# Altium PCB AT_START_F425_V1.0.pcbdoc (part 2 of 2)
Units mil, origin at the board's own origin, x right, y up, seen from the top; angles counter-clockwise.
Board outline 5780.4 x 4040.43 mil, 2 copper layers (Top Layer, Bottom Layer); 128 components, 128 nets, 477 pads, 724 vias.
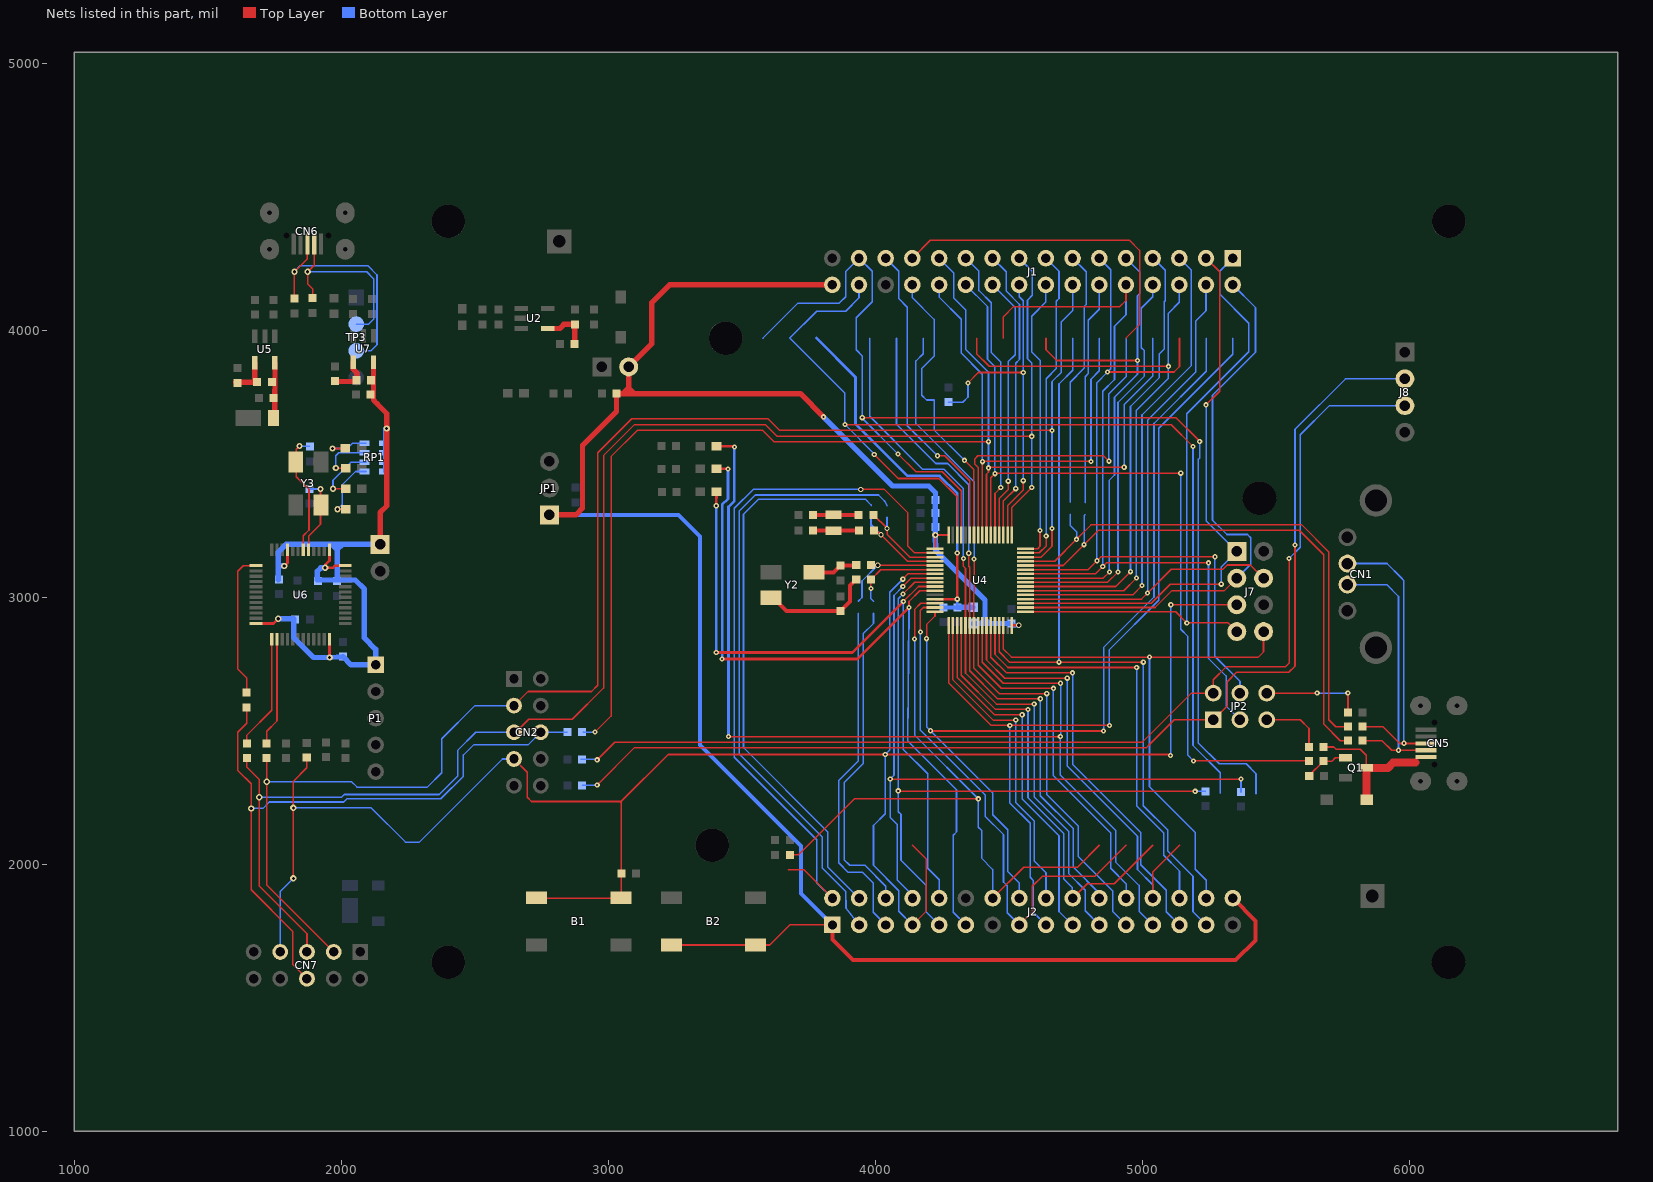
[diagram p2: the nets of this part, all layers, seen from the top]

## Via types
v1: diameter 19.69, hole 7.87, Top Layer to Bottom Layer, tented both sides, 682 vias
v2: diameter 23.62, hole 11.81, Top Layer to Bottom Layer, tented both sides, 33 vias
v3: diameter 19.69, hole 12, Top Layer to Bottom Layer, tented both sides, 5 vias
v4: diameter 27.56, hole 15.75, Top Layer to Bottom Layer, tented both sides, 3 vias
v5: diameter 24, hole 12, Top Layer to Bottom Layer, tented both sides, 1 vias

## Nets (pads, with @x,y where several pads share a name; then routed paths per layer and width w, separated by ;. In a path a pad name is that pad's centre, name@x,y a point inside that pad or via, vN(x,y) a via of type N, cw(c..) or ccw(c..) an arc to the next point about the centre after c; other vN are vias at no path point) (continued)
M_ATLK_SWCLK: R41.2 U6.25 | length 427
  Top Layer w6: R41.2@1645.86,2454.01 1645.86,2483.43 1739.07,2576.64 U6.25@1739.07,2842.36
M_ATLK_SWDIO: R44.2 U6.26 | length 404.5
  Top Layer w6: R44.2@1719.86,2454.01 1719.86,2497.43 1758.75,2536.32 U6.26@1758.75,2842.36
M_ATLK_SWO: R52.2 U6.13 | length 541.5
  Top Layer w6: R52.2@1645.66,2646.97 1645.66,2696.8 1611.44,2731.01 1611.44,3097.01 1632.39,3117.97 U6.13@1680.01,3117.97
NRST: B1.1 B1.2 C13.2 CN2.7 CN7.7 J2.7 J7.5 R46.1 U4.7 | length 7810.6
  Top Layer w6: v2(1820.09,1946.57) 1820.09,2310.57 1870.09,2360.57 1870.09,2393.24 R46.1@1867.86,2391.01 ; CN2.7@2646.44,2393.84 2696.09,2344.2 2696.09,2250.57 2712.09,2234.57 3043.59,2234.57 ; B1.1@2730.09,1872.57 3053.05,1872.57 B1.2@3055.05,1870.57 ; B1.2@3045.09,1872.57 3048.59,1876.07 C13.2@3048.59,1964.57 3048.59,2235.07 ; 3048.59,2228.51 3048.59,2229.57 3043.59,2234.57 ; v1(4103.09,3067.57) 4122.71,3087.19 U4.7@4223.8,3087.18 ; J2.7@4139.38,1772.14 4190.09,1822.84 4190.09,2019.87 4139.39,2070.57 ; v1(5106.09,2407.05) 5102.58,2410.57 v1(4037.09,2410.57) 3224.09,2410.57 3048.59,2235.07 ; v1(5107.09,2971.57) 5353.99,2971.57 J7.5@5354.39,2971.16 ; 3043.59,2234.57 3048.59,2235.07
  Bottom Layer w6: CN7.7@1770.89,1670.96 1770.86,1897.34 v2(1820.09,1946.57) ; v2(1820.09,2210.57) 2112.09,2210.57 2240.09,2082.57 2292.09,2082.57 2603.37,2393.84 CN2.7@2646.44,2393.84 ; v1(4103.09,3067.57) 4054.09,3018.57 4054.09,2427.57 v1(4037.09,2410.57) 4037.09,2188.57 3993.09,2144.57 3993.09,1995.57 4088.09,1900.57 4088.09,1823.43 J2.7@4139.38,1772.14 ; v1(5106.09,2407.05) 5106.09,2970.57 v1(5107.09,2971.57)
OTG_FS_D+: CN1.3 CN5.3 R19.2 | length 1110
  Top Layer w6: R19.2@5825.59,2514.57 5902.09,2514.57 5964.69,2451.97 CN5.3@6062.07,2451.97
  Bottom Layer w6: CN1.3@5768.74,3125.94 5916.72,3125.93 5968.09,3074.57 5980.09,3062.57 5980.09,2740.57 v1(5980.09,2452.57)
OTG_FS_D-: CN1.2 CN5.2 R20.1 | length 1037.3
  Top Layer w6: R20.1@5825.59,2462.57 5898.09,2462.57 5934.28,2426.38 CN5.2@6062.07,2426.38
  Bottom Layer w6: CN1.2@5768.74,3047.2 5915.46,3047.2 5960.09,3002.57 v1(5960.09,2426.57)
OTG_FS_ID: JP2.6 R18.2 | length 376.2
  Top Layer w6: JP2.6@5466.09,2640.57 v1(5655.09,2640.57) ; v1(5770.09,2640.57) 5770.59,2640.07 R18.2@5770.59,2568.57
  Bottom Layer w6: v1(5655.09,2640.57) v1(5770.09,2640.57)
OTG_FS_VBUS: JP2.5 R21.2 | length 241.5
  Top Layer w6: JP2.5@5466.09,2540.57 5592.09,2540.57 5624.59,2508.07 R21.2@5624.59,2438.57
PA0: J2.14 R5.1 U4.14 | length 2564.2
  Top Layer w6: R5.1@3679.59,2034.57 3712.09,2034.57 3922.09,2244.57 v1(4386.09,2244.57) ; v1(4147.09,2843.57) 4147.09,2953.57 4170.47,2976.95 U4.14@4223.8,2976.95 ; J2.14@4439.38,1872.14 4555.81,1988.57 4757.39,1988.57 4839.39,2070.57
  Bottom Layer w6: v1(4147.09,2843.57) 4147.09,2483.57 v1(4386.09,2244.57) 4386.09,2138.57 4398.09,2126.57 4398.09,2022.57 4439.39,1979.87 J2.14@4439.38,1872.14
PA1: J2.15 U4.15 | length 1970.6
  Top Layer w6: v1(4169.09,2869.57) 4169.09,2950.57 4179.73,2961.2 U4.15@4223.8,2961.2 ; J2.15@4539.38,1772.14 4588.09,1820.85 4588.09,1916.57 4626.09,1954.57 4823.39,1954.57 4939.39,2070.57
  Bottom Layer w6: v1(4169.09,2869.57) 4169.09,2501.57 4412.09,2258.57 4412.09,2178.57 4480.09,2110.57 4480.09,1932.57 4494.09,1918.57 4494.09,1817.43 J2.15@4539.38,1772.14
PA2: J2.16 U4.16 | length 3509.9
  Top Layer w6: v1(4192.09,2844.57) 4192.09,2897.57 4223.79,2929.27 U4.16@4223.8,2945.45 ; v1(4207.09,2499.57) 4208.09,2498.57 v1(4855.09,2498.57)
  Bottom Layer w6: v1(4192.09,2844.57) 4192.09,2514.57 v1(4207.09,2499.57) 4440.09,2266.57 4440.09,2184.57 4496.09,2128.57 4496.09,1972.57 4539.39,1929.27 J2.16@4539.38,1872.14 ; v1(4855.09,2498.57) 4855.09,2811.57 5044.09,3000.57 5044.09,3650.57 5239.39,3845.86 5239.39,3970.57
PA3: J2.17 U4.17 | length 3329.4
  Top Layer w6: U4.17@4274.98,2894.28 4274.98,2678.68 4434.09,2519.57 v1(4504.09,2519.57) v1(4877.09,2519.57)
  Bottom Layer w6: v1(4504.09,2519.57) 4504.09,2228.57 4580.09,2152.57 4580.09,1950.57 4592.09,1938.57 4592.09,1819.43 J2.17@4639.38,1772.14 ; v1(4877.09,2519.57) 4877.09,2803.57 5062.09,2988.57 5062.09,3632.57 5339.09,3909.57 5339.09,3970.57
PA4: J2.20 U4.20 | length 1648.6
  Top Layer w6: U4.20@4322.23,2894.28 4322.23,2707.43 4450.09,2579.57 v1(4572.09,2579.57) ; J2.20@4739.38,1872.14 4793.81,1926.57 4895.39,1926.57 5039.39,2070.57
  Bottom Layer w6: v1(4572.09,2579.57) 4572.09,2248.57 4706.09,2114.57 4706.09,1944.57 4738.09,1912.57 4738.09,1873.43 J2.20@4739.38,1872.14
PA5: J2.21 U4.21 | length 2684.1
  Top Layer w6: v1(4330.09,3144.57) 4330.09,3115.57 4337.96,3107.69 U4.21@4337.97,2894.28 4337.97,2715.68 4454.09,2599.57 v1(4595.09,2599.57)
  Bottom Layer w6: 3979.39,3970.57 3979.39,3677.26 4178.09,3478.57 4258.09,3478.57 4330.09,3406.57 v1(4330.09,3144.57) ; v1(4595.09,2599.57) 4595.09,2251.57 4724.09,2122.57 4724.09,1964.57 4786.09,1902.57 4786.09,1825.43 J2.21@4839.38,1772.14
PA6: J2.22 U4.22 | length 2533.3
  Top Layer w6: v1(4350.09,3164.57) 4350.09,3115.57 4353.71,3111.94 U4.22@4353.72,2894.28 4353.72,2723.93 4458.09,2619.57 v1(4618.09,2619.57)
  Bottom Layer w6: 4079.39,3970.57 4079.39,3647.26 4226.09,3500.57 4271.09,3500.57 4350.09,3421.57 v1(4350.09,3164.57) ; v1(4618.09,2619.57) 4618.09,2256.57 4742.09,2132.57 4742.09,1988.57 4839.39,1891.27 J2.22@4839.38,1872.14
PA7: J2.23 U4.23 | length 2639.8
  Top Layer w6: v1(4370.09,3142.57) U4.23@4369.47,2894.28 4369.47,2734.18 4465.09,2638.57 v1(4642.09,2638.57)
  Bottom Layer w6: 4179.39,3970.57 4179.39,3911.86 4152.09,3884.57 4152.09,3650.57 4370.09,3432.57 v1(4370.09,3142.57) ; v1(4642.09,2638.57) 4642.09,2260.57 4760.09,2142.57 4760.09,2028.71 4890.09,1898.71 4890.09,1821.43 J2.23@4939.38,1772.14
PA8: J1.9 U4.41 | length 1970.4
  Top Layer w6: U4.41@4562.38,3071.43 4853.96,3071.44 v1(4877.09,3094.57) ; 4639.39,3970.57 4639.39,3927.26 4680.09,3886.57 v1(4982.09,3886.57)
  Bottom Layer w6: v1(4877.09,3094.57) 4877.09,3438.57 4896.09,3457.57 4896.09,3748.57 4982.09,3834.57 4982.09,4129.53 4990.09,4137.53 4990.09,4218.73 J1.9@4938.96,4269.86
PA9: J1.10 JP2.3 U4.42 | length 3053.8
  Top Layer w6: 4479.39,3970.57 4479.39,4049.86 4518.09,4088.57 4916.09,4088.57 4938.96,4111.44 J1.10@4938.96,4169.86 ; U4.42@4562.38,3087.18 4824.71,3087.19 v1(4852.09,3114.57) 4866.09,3128.57 v1(5248.09,3128.57)
  Bottom Layer w6: v1(4852.09,3114.57) 4852.09,3771.57 4896.09,3815.57 4896.09,4014.57 4938.96,4057.43 J1.10@4938.96,4169.86 ; v1(5248.09,3128.57) 5248.09,2770.57 5314.09,2704.57 5314.09,2592.57 JP2.3@5366.09,2540.57
PA10: J1.11 JP2.4 U4.43 | length 2836.9
  Top Layer w6: U4.43@4562.38,3102.93 4796.46,3102.94 v1(4830.09,3136.57) 4845.09,3151.57 v1(5272.09,3151.57) ; v1(4870.09,3843.57) 5119.09,3843.57 5139.39,3863.86 5139.39,3970.57
  Bottom Layer w6: v1(4830.09,3136.57) 4830.09,3803.57 v1(4870.09,3843.57) 4882.09,3855.57 4882.09,4226.73 J1.11@4838.96,4269.86 ; v1(5272.09,3151.57) 5272.09,2778.57 5366.09,2684.57 JP2.4@5366.09,2640.57
PA11: R20.2 U4.44 | length 2075.2
  Top Layer w6: U4.44@4562.38,3118.68 4704.21,3118.69 v1(4782.09,3196.57) 4836.09,3250.57 5588.09,3250.57 5680.09,3158.57 5680.09,2524.57 5742.09,2462.57 R20.2@5770.59,2462.57
  Bottom Layer w6: v1(4782.09,3196.57) 4782.09,3305.45 4786.09,3309.45
PA11_E: J1.12 | length 837.9
  Bottom Layer w6: 4786.09,3353.84 4786.09,3825.57 4798.09,3837.57 4798.09,4037.57 4838.96,4078.43 J1.12@4838.96,4169.86
PA12: R19.1 U4.45 | length 2050.9
  Top Layer w6: U4.45@4562.38,3134.43 4671.95,3134.43 v1(4754.09,3216.57) 4808.09,3270.57 5598.09,3270.57 5699.09,3169.57 5699.09,2540.57 5725.09,2514.57 R19.1@5770.59,2514.57
  Bottom Layer w6: 4730.09,3311.28 4730.09,3268.57 4754.09,3244.57 v1(4754.09,3216.57)
PA12_E: J1.13 | length 960.2
  Bottom Layer w6: 4730.09,3355.68 4730.09,3805.57 4782.09,3857.57 4782.09,4088.57 4790.09,4096.56 4790.09,4218.73 J1.13@4738.96,4269.86
PA13/SWDIO: CN2.3 CN7.3 J1.14 R44.1 U4.46 | length 6078.3
  Top Layer w6: R44.1@1719.86,2393.01 1719.86,2308.8 v2(1720.09,2308.57) 1720.09,1921.79 CN7.3@1970.89,1670.96 ; CN2.3@2646.44,2593.84 2699.16,2646.57 2937.09,2646.57 2960.09,2669.57 2960.09,3540.57 3088.09,3668.57 3598.09,3668.57 3642.09,3624.57 v1(4662.09,3624.57) ; U4.46@4562.38,3150.18 4621.7,3150.18 4662.09,3190.57 v1(4662.09,3257.57)
  Bottom Layer w6: v2(1720.09,2308.57) 2038.09,2308.57 2058.09,2288.57 2322.09,2288.57 2376.09,2342.57 2376.09,2469.57 2500.37,2593.84 CN2.3@2646.44,2593.84 ; v1(4662.09,3257.57) v1(4662.09,3624.57) 4662.09,3807.57 4696.09,3841.57 4696.09,4030.57 4738.96,4073.43 J1.14@4738.96,4169.86
PA14/SWCLK: CN2.5 CN7.5 J1.17 R41.1 U4.49 | length 5974.6
  Top Layer w6: R41.1@1645.86,2393.01 1645.86,2362.8 1692.09,2316.57 1692.09,1917.57 1870.86,1738.8 CN7.5@1870.89,1670.96 ; CN2.5@2646.44,2493.84 2653.37,2493.84 2702.09,2542.57 2865.09,2542.57 2982.09,2659.57 2982.09,3530.57 3098.09,3646.57 3588.09,3646.57 3632.09,3602.57 v1(4586.09,3602.57) ; U4.49@4511.2,3232.86 4511.19,3335.67 v1(4586.09,3410.57)
  Bottom Layer w6: v2(1692.09,2250.57) 2000.09,2250.57 2010.09,2260.57 2366.09,2260.57 2435.09,2329.57 2435.09,2425.57 2503.37,2493.84 CN2.5@2646.44,2493.84 ; J1.17@4538.96,4269.86 4588.09,4220.73 4588.09,4130.56 4570.09,4112.56 4570.09,3893.26 4586.09,3877.26 v1(4586.09,3602.57) v1(4586.09,3410.57)
PA15: J1.18 R39.2 U4.50 | length 1324.6
  Top Layer w6: v1(4347.09,3802.57) 4386.09,3841.57 v1(4554.09,3841.57) ; U4.50@4495.45,3232.86 4495.44,3342.92 4554.09,3401.57 v1(4554.09,3436.57)
  Bottom Layer w6: R39.2@4274.09,3730.43 4327.95,3730.43 4347.09,3749.57 v1(4347.09,3802.57) ; J1.18@4538.96,4169.86 4538.96,4125.69 4554.09,4110.56 v1(4554.09,3841.57) v1(4554.09,3436.57)
PB0: J2.26 U4.26 | length 1657
  Top Layer w6: U4.26@4416.71,2894.28 4416.71,2764.95 4485.09,2696.57 v1(4719.09,2696.57) ; J2.26@5039.38,1872.14 5039.39,1970.56 5139.39,2070.57
  Bottom Layer w6: v1(4719.09,2696.57) 4719.09,2367.57 4982.09,2104.57 4982.09,1979.57 5039.39,1922.27 J2.26@5039.38,1872.14
PB1: J2.27 U4.27 | length 1560.2
  Top Layer w6: U4.27@4432.46,2894.28 4432.46,2775.2 4491.09,2716.57 v1(4739.09,2716.57)
  Bottom Layer w6: v1(4739.09,2716.57) 4739.09,2373.57 4994.09,2118.57 4994.09,1997.57 5090.09,1901.57 5090.09,1821.43 J2.27@5139.38,1772.14
PB2: J2.28 U4.28 | length 1590.8
  Top Layer w6: U4.28@4448.21,2894.28 4448.21,2785.45 4497.09,2736.57 v1(4979.09,2736.57)
  Bottom Layer w6: v1(4979.09,2736.57) 4979.09,2482.09 4980.09,2481.09 4980.09,2216.57 5080.09,2116.57 5080.09,2033.14 5139.38,1973.86 J2.28@5139.38,1872.14
PB3: J1.23 R8.1 U4.55 | length 4727.7
  Top Layer w6: v1(2950.09,2494.57) 3010.09,2554.57 3010.09,3526.57 3108.09,3624.57 3578.09,3624.57 3620.09,3582.57 v1(4424.09,3582.57) ; U4.55@4416.71,3232.86 4416.71,3461.18 4424.09,3468.57 v1(4424.09,3484.57) 4426.09,3486.57 v1(4932.09,3486.57)
  Bottom Layer w6: R8.1@2905.24,2494.74 v1(2950.09,2494.57) ; J1.23@4238.96,4269.86 4294.09,4214.73 4294.09,4120.56 4338.09,4076.57 4338.09,3928.57 4424.09,3842.57 v1(4424.09,3582.57) v1(4424.09,3484.57) ; v1(4932.09,3486.57) 4932.09,3721.57 5039.39,3828.86 5039.39,3970.57
PB4: J1.24 U4.56 | length 1886.6
  Top Layer w6: U4.56@4400.97,3232.86 4400.96,3507.44 v1(4401.09,3507.57) 4402.09,3508.57 v1(4808.09,3508.57)
  Bottom Layer w6: J1.24@4238.96,4169.86 4238.96,4124.69 4322.09,4041.57 4322.09,3914.57 4401.09,3835.57 v1(4401.09,3507.57) ; v1(4808.09,3508.57) 4808.09,3816.57 4839.39,3847.86 4839.39,3970.57
PB5: J1.25 U4.57 | length 2536.7
  Top Layer w6: J1.25@4138.96,4269.86 4205.66,4336.56 4952.09,4336.56 4990.09,4298.56 4990.09,4021.26 4939.39,3970.57 ; U4.57@4385.22,3232.86 4385.22,3485.43 4373.09,3497.57 4373.09,3518.57 4384.09,3529.57 4855.09,3529.57 v1(4875.09,3509.57)
  Bottom Layer w6: v1(4875.09,3509.57) 4875.09,3761.57 4939.39,3825.86 4939.39,3970.57
PB6: J1.26 U4.58 | length 1087
  Top Layer w6: v1(4334.09,3512.57) 4369.46,3477.19 U4.58@4369.47,3232.86
  Bottom Layer w6: J1.26@4138.96,4169.86 4138.96,4121.69 4220.09,4040.57 4220.09,3902.57 4174.09,3856.57 4174.09,3756.57 4192.17,3738.64 4220.09,3738.64 4220.09,3626.57 v1(4334.09,3512.57)
PB7: J1.27 U4.59 | length 1183.2
  Top Layer w6: v1(4233.09,3529.57) 4260.09,3529.57 4353.71,3435.94 U4.59@4353.72,3232.86
  Bottom Layer w6: J1.27@4038.96,4269.86 4088.09,4220.73 4088.09,4118.56 4120.09,4086.57 4120.09,3642.57 v1(4233.09,3529.57)
PB8: J1.29 U4.61 | length 4613.6
  Top Layer w6: v1(3951.09,3672.57) 5126.09,3672.57 v1(5215.09,3583.57) ; v1(4085.09,3536.57) 4152.09,3469.57 4251.09,3469.57 4322.23,3398.43 U4.61@4322.23,3232.86
  Bottom Layer w6: 3579.39,3970.57 3710.39,4101.56 3865.09,4101.56 3889.09,4125.56 3889.09,4219.99 J1.29@3938.96,4269.86 3988.09,4220.73 3988.09,4106.56 3928.09,4046.57 3928.09,3926.57 3951.09,3903.57 v1(3951.09,3672.57) 3951.09,3670.57 v1(4085.09,3536.57) ; v1(5215.09,3583.57) 5215.09,3521.57 5210.09,3516.51 5210.09,2453.57 5288.09,2375.57 5389.09,2375.57 5426.09,2338.57 5426.09,2263.84
PB9: J1.30 U4.62 | length 4136.2
  Top Layer w6: v1(3886.09,3646.57) 3938.44,3646.57 3938.09,3646.57 5109.09,3645.57 v1(5190.09,3564.57) ; v1(3996.09,3534.57) 4086.09,3444.57 4238.09,3444.57 4306.48,3376.18 U4.62@4306.48,3232.86
  Bottom Layer w6: J1.30@3938.96,4169.86 3938.96,4121.44 3889.09,4071.57 3780.39,4071.57 3679.39,3970.57 3886.09,3763.86 v1(3886.09,3646.57) 3996.09,3536.57 v1(3996.09,3534.57) ; v1(5190.09,3564.57) 5190.09,2444.57 5292.09,2342.57 5292.09,2265.84
PB10: J2.29 U4.29 | length 2972
  Top Layer w6: U4.29@4463.96,2894.28 4463.96,2795.7 4503.09,2756.57 v1(4688.09,2756.57) v1(5004.09,2756.57)
  Bottom Layer w6: v1(4688.09,2756.57) 4688.09,3798.57 4739.39,3849.86 4739.39,3970.57 ; v1(5004.09,2756.57) 5004.09,2218.57 5096.09,2126.57 5096.09,2048.57 5190.09,1954.57 5190.09,1821.43 J2.29@5239.38,1772.14
PB11: J2.30 J7.8 U4.30 | length 2151.2
  Top Layer w6: U4.30@4479.71,2894.28 4479.71,2805.95 4510.09,2775.57 v1(5027.09,2775.57) 5435.09,2775.57 5454.39,2794.86 J7.8@5454.39,2871.16
  Bottom Layer w6: v1(5027.09,2775.57) 5027.09,2289.57 5198.09,2118.57 5198.09,1980.57 5239.38,1939.28 J2.30@5239.38,1872.14
PB12: J1.1 J7.7 U4.33 | length 2350.6
  Top Layer w6: U4.33@4562.38,2945.45 5125.2,2945.46 v1(5167.09,2903.57) 5321.99,2903.57 J7.7@5354.39,2871.16
  Bottom Layer w6: v1(5167.09,2903.57) 5167.09,3687.57 5399.09,3919.57 5399.09,4026.59 5290.09,4135.59 5290.09,4220.99 J1.1@5338.96,4269.86
PB13: J1.2 J7.3 U4.34 | length 2164
  Top Layer w6: U4.34@4562.38,2961.2 5047.73,2961.2 5111.09,3024.57 5307.79,3024.57 J7.3@5354.39,3071.16
  Bottom Layer w6: J1.2@5338.96,4169.86 5424.09,4084.74 5424.09,3917.57 5263.09,3756.57 5263.09,3288.57 5317.09,3234.57 5394.09,3234.57 5406.09,3222.57 5406.09,3122.86 J7.3@5354.39,3071.16
PB14: J1.3 J7.1 U4.35 | length 2102.6
  Top Layer w6: U4.35@4562.38,2976.95 5033.47,2976.95 5105.09,3048.57 v1(5296.09,3048.57) ; J1.3@5238.96,4269.86 5290.09,4218.73 5290.09,3771.57 v1(5239.09,3720.57) ; J7.1@5350.69,3171.16 J7.1@5354.39,3171.16
  Bottom Layer w6: v1(5239.09,3720.57) 5239.09,3286.47 J7.1@5354.39,3171.16 5296.09,3112.86 v1(5296.09,3048.57)
PB15: J1.4 J7.4 U4.36 | length 2210.4
  Top Layer w6: U4.36@4562.38,2992.7 4997.22,2992.7 v1(5020.09,3015.57) 5109.09,3104.57 5302.09,3104.57 5318.09,3120.57 5404.99,3120.57 J7.4@5454.39,3071.16
  Bottom Layer w6: v1(5020.09,3015.57) 5020.09,3663.57 5200.09,3843.57 5200.09,4034.57 5238.96,4073.43 J1.4@5238.96,4169.86
PC0: J2.8 R37.2 U4.8 | length 2717.8
  Top Layer w6: v1(4056.09,2318.57) v1(5370.09,2318.57) ; v1(4103.09,3039.57) 4134.96,3071.44 U4.8@4223.8,3071.43
  Bottom Layer w6: v1(4103.09,3039.57) 4070.09,3006.57 4070.09,2332.57 v1(4056.09,2318.57) 4056.09,2174.57 4082.09,2148.57 4082.09,1940.57 4139.39,1883.27 J2.8@4139.38,1872.14 ; R37.2@5370.09,2270.07 v1(5370.09,2318.57)
PC1: J2.9 R34.2 U4.9 | length 2599.4
  Top Layer w6: v1(4086.09,2274.57) 4088.09,2272.57 v1(5198.09,2272.57) ; v1(4104.09,3011.57) 4148.21,3055.69 U4.9@4223.8,3055.68
  Bottom Layer w6: v1(4104.09,3011.57) 4086.09,2993.57 4086.09,2196.57 4096.09,2186.57 4096.09,2014.57 4190.09,1920.57 4190.09,1821.44 J2.9@4239.38,1772.14 ; v1(5198.09,2272.57) 5235.59,2272.57 R34.2@5236.09,2272.07
PC2: J2.10 LED2.2 U4.10 | length 2691.4
  Top Layer w6: v1(4105.09,2983.57) 4161.47,3039.95 U4.10@4223.8,3039.95
  Top Layer w10: v1(3404.09,2792.57) 3914.09,2792.57 v1(4105.09,2983.57) ; v1(3404.09,3342.57) LED2.2@3405.05,3394.77
  Bottom Layer w6: v1(4105.09,2983.57) 4105.09,2429.57 4196.09,2338.57 4196.09,1984.57 4239.39,1941.27 J2.10@4239.38,1872.14
  Bottom Layer w10: v1(3404.09,2792.57) v1(3404.09,3342.57)
PC3: J2.11 LED3.2 U4.11 | length 2970.5
  Top Layer w6: v1(4126.09,2961.57) 4126.09,2983.57 4166.72,3024.2 U4.11@4223.8,3024.2
  Top Layer w10: LED3.2@3405.05,3480.77 3447.88,3480.78 v1(3448.09,3480.57) ; v1(3426.09,2768.57) 3933.09,2768.57 v1(4126.09,2961.57)
  Bottom Layer w6: v1(4126.09,2961.57) 4121.09,2461.57 4304.09,2278.57 4304.09,2120.57 4292.09,2108.57 4292.09,1819.43 J2.11@4339.38,1772.14
  Bottom Layer w10: v1(3426.09,2768.57) 3426.09,3346.57 3448.09,3368.57 v1(3448.09,3480.57)
PC4: J2.24 U4.24 | length 1365.9
  Top Layer w6: U4.24@4385.22,2894.28 4385.22,2745.43 4472.09,2658.57 v1(4667.09,2658.57)
  Bottom Layer w6: v1(4667.09,2658.57) 4667.09,2331.57 4882.09,2116.57 4882.09,1984.03 4939.39,1926.73 J2.24@4939.38,1872.14
PC5: J2.25 LED4.2 U4.25 | length 3918.4
  Top Layer w6: v1(3450.09,2477.57) v1(4693.09,2477.57) ; U4.25@4400.97,2894.28 4400.97,2755.68 4479.09,2677.57 v1(4694.09,2677.57)
  Top Layer w10: LED4.2@3405.05,3564.77 3469.88,3564.78 v1(3472.09,3562.57)
  Bottom Layer w6: v1(4694.09,2677.57) 4694.09,2478.57 v1(4693.09,2477.57) 4693.09,2333.57 4900.09,2126.57 4900.09,2007.69 4988.09,1919.69 4988.09,1823.43 J2.25@5039.38,1772.14
  Bottom Layer w10: v1(3450.09,2477.57) 3450.09,3338.57 3472.09,3360.57 v1(3472.09,3562.57)
PC6: J1.5 U4.37 | length 1772.9
  Top Layer w6: U4.37@4562.38,3008.45 4963.97,3008.45 v1(4999.09,3043.57)
  Bottom Layer w6: v1(4999.09,3043.57) 4999.09,3682.57 5184.09,3867.57 5184.09,4224.73 J1.5@5138.96,4269.86
PC7: J1.6 U4.38 | length 2397.5
  Top Layer w6: 4379.39,3970.57 4379.39,3911.49 4426.32,3864.57 v1(5098.09,3864.57) ; U4.38@4562.38,3024.2 4930.72,3024.2 v1(4978.09,3071.57)
  Bottom Layer w6: v1(4978.09,3071.57) 4978.09,3700.57 5098.09,3820.57 5098.09,4063.57 5138.96,4104.44 J1.6@5138.96,4169.86
PC8: J1.7 U4.39 | length 1665.5
  Top Layer w6: U4.39@4562.38,3039.95 4900.47,3039.95 v1(4956.09,3095.57)
  Bottom Layer w6: v1(4956.09,3095.57) 4956.09,3714.57 5064.38,3822.86 5064.38,3912.24 5082.09,3929.95 5082.09,4106.56 5086.09,4110.56 5086.09,4224.56 5040.79,4269.86 J1.7@5038.96,4269.86
PC9: J1.8 U4.40 | length 1501.9
  Top Layer w6: U4.40@4562.38,3055.68 4870.21,3055.69 v1(4909.09,3094.57)
  Bottom Layer w6: v1(4909.09,3094.57) 4909.09,3729.57 5008.09,3828.57 5008.09,3922.57 4996.09,3934.57 4996.09,4082.57 5038.96,4125.44 J1.8@5038.96,4169.86
PC10: J1.19 U4.51 | length 1103.9
  Top Layer w6: U4.51@4479.71,3232.86 4479.7,3360.18 v1(4526.09,3406.57)
  Bottom Layer w6: J1.19@4438.96,4269.86 4490.09,4218.73 4490.09,4146.56 4540.09,4096.56 4540.09,3890.57 4526.09,3876.57 v1(4526.09,3406.57)
PC11: J1.20 U4.52 | length 997.2
  Top Layer w6: U4.52@4463.96,3232.86 4463.96,3369.43 4498.09,3403.57 v1(4498.09,3434.57)
  Bottom Layer w6: J1.20@4438.96,4169.86 4524.09,4084.74 4524.09,3908.57 4498.09,3882.57 v1(4498.09,3434.57)
PC12: J1.21 U4.53 | length 1100.4
  Top Layer w6: U4.53@4448.21,3232.86 4448.2,3388.68 v1(4470.09,3410.57)
  Bottom Layer w6: J1.21@4338.96,4269.86 4388.09,4220.73 4388.09,4148.56 4434.09,4102.56 4434.09,3916.57 4445.21,3905.45 4470.09,3880.57 v1(4470.09,3410.57)
PC13: J2.2 U4.2 | length 4430.4
  Top Layer w6: 3673.37,1978.57 3732.96,1978.57 J2.2@3839.38,1872.14 ; v3(3945.09,3403.57) 4034.09,3403.57 4122.09,3315.57 4122.09,3190.57 4146.73,3165.93 U4.2@4223.8,3165.93
  Bottom Layer w6: 3502.09,3362.57 3472.09,3332.57 ; v3(3945.09,3403.57) 3543.09,3403.57 3472.09,3332.57 ; 3472.09,2400.57 3781.09,2091.57 ; 3472.09,2400.57 3472.09,3332.57 ; 3472.09,2400.57 3472.09,3332.57 ; 3472.09,2400.57 3781.09,2091.57 ; 3781.09,1930.43 J2.2@3839.38,1872.14 3781.09,1930.43 ; 3781.09,1930.43 3781.09,2091.57 ; 3781.09,1930.43 3781.09,2091.57
PC14: J2.3 | length 2332
  Bottom Layer w6: J2.3@3939.38,1772.14 3890.09,1834.57 3889.09,1897.57 3801.09,1985.57 3801.09,2101.57 3490.09,2412.57 3490.09,3322.57 3550.09,3382.57 4012.09,3382.57 4034.56,3360.09 4044.09,3341.84
PC14/LEXT_IN: R22.1 U4.3 | length 349.4
  Top Layer w6: v3(4044.09,3257.57) 4044.09,3235.57 4129.48,3150.18 U4.3@4223.8,3150.18
  Top Layer w8: R22.1@3992.59,3308.57 v3(4044.09,3257.57)
  Bottom Layer w8: v3(4044.09,3257.57) 4044.09,3297.45
PC15: J2.4 | length 2131
  Bottom Layer w6: J2.4@3939.09,1872.57 3821.09,1990.57 3821.09,2121.57 3506.09,2436.57 3506.09,3310.57 3562.09,3366.57 3963.09,3366.57 3984.09,3345.57 3984.09,3341.84
PC15/LEXT_OUT: R23.1 U4.4 | length 356.5
  Top Layer w6: v3(4021.09,3233.57) 4120.23,3134.43 U4.4@4223.8,3134.43
  Top Layer w8: R23.1@3994.59,3250.57 4004.09,3250.57 v3(4021.09,3233.57)
  Bottom Layer w8: 3984.09,3297.45 3984.09,3270.57 v3(4021.09,3233.57)
PD2: J1.22 R17.2 U4.54 | length 3215.5
  Top Layer w6: U4.54@4432.46,3232.86 4432.45,3446.93 v1(4448.09,3462.57) 4450.09,3464.57 v1(5144.09,3464.57) ; v1(5192.09,2386.57) R17.2@5624.59,2386.57
  Bottom Layer w6: J1.22@4339.09,4169.56 4420.09,4088.57 4420.09,3891.45 4448.09,3863.45 v1(4448.09,3462.57) ; v1(5144.09,3464.57) 5144.09,2879.57 5171.09,2852.57 5171.09,2407.57 v1(5192.09,2386.57)
PF0: J2.5 | length 1303
  Bottom Layer w6: 3936.09,2940.28 3936.09,2386.57 3863.09,2313.57 3863.09,2004.57 3898.09,1969.57 3952.09,1969.57 3992.09,1929.57 3992.09,1819.43 J2.5@4039.38,1772.14
PF0/HEXT_IN: R26.1 U4.5 | length 405.7
  Top Layer w6: v3(4009.09,3119.47) U4.5@4223.8,3118.68
  Top Layer w8: R26.1@3983.59,3120.57 3984.69,3119.47 v3(4009.09,3119.47)
  Bottom Layer w6: 3936.09,2984.68 3950.09,2998.68 3950.09,3060.47 v3(4009.09,3119.47)
PF1: J2.6 | length 1211.8
  Bottom Layer w6: 3993.09,2940.28 3993.09,2901.57 3954.09,2862.57 3954.09,2375.57 3883.09,2304.57 3883.09,2016.57 3904.09,1995.57 3961.09,1995.57 4039.39,1917.27 J2.6@4039.38,1872.14
PF1/HEXT_OUT: R27.1 U4.6 | length 341.1
  Top Layer w6: v1(3983.59,3032.57) R27.1@3983.59,3066.57 4019.96,3102.93 U4.6@4223.8,3102.93
  Bottom Layer w6: v1(3983.59,3032.57) 3983.59,2994.18 3993.09,2984.68
PF4: J2.18 U4.18 | length 1216.3
  Top Layer w6: U4.18@4290.73,2894.28 4290.73,2689.93 4441.09,2539.57 v1(4526.09,2539.57)
  Bottom Layer w6: v1(4526.09,2539.57) 4526.09,2230.57 4596.09,2160.57 4596.09,2010.57 4639.39,1967.28 J2.18@4639.38,1872.14
PF5: J2.19 U4.19 | length 1362.6
  Top Layer w6: U4.19@4306.48,2894.28 4306.48,2699.18 4446.09,2559.57 v1(4550.09,2559.57)
  Bottom Layer w6: v1(4550.09,2559.57) 4550.09,2244.02 4688.09,2106.02 4688.09,1822.57 J2.19@4739.38,1772.14
PF6: J1.15 U4.47 | length 1206.9
  Top Layer w6: U4.47@4562.38,3165.93 4614.45,3165.93 4640.09,3191.57 v1(4640.09,3229.57)
  Bottom Layer w6: J1.15@4638.96,4269.86 4688.09,4220.73 4688.09,4118.56 4678.09,4108.56 4678.09,3856.57 4640.09,3818.57 v1(4640.09,3229.57)
PF7: J1.16 U4.48 | length 1073.3
  Top Layer w6: U4.48@4562.38,3181.68 4608.2,3181.68 4617.09,3190.57 v1(4617.09,3249.57)
  Bottom Layer w6: v1(4617.09,3249.57) 4618.09,3250.57 4618.09,3600.3 4618.09,3886.57 4586.09,3918.57 4586.09,4052.57 4638.96,4105.44 J1.16@4638.96,4169.86
Q1_1: Q1.1 R16.2 R17.1 | length 165.9
  Top Layer w6: R16.2@5625.59,2330.57 5625.59,2332.57 R17.1@5679.59,2386.57 5681.59,2384.57 5710.09,2384.57 5723.49,2397.97 Q1.1@5760.72,2397.97
R22_2: C23.2 R22.2 Y1.1 | length 171
  Top Layer w15: C23.2@3766.59,3308.57 Y1.1@3843.09,3308.57 R22.2@3937.59,3308.57
R49_1: R43.1 R49.1 U7.4 | length 163.5
  Top Layer w20: R49.1@1972.44,3808.01 2058.44,3808.01 2058.44,3839.01 2044.86,3852.59 U7.4@2044.86,3879.91
R51_1: R50.1 R51.1 U5.4 | length 156.2
  Top Layer w20: R51.1@1604.44,3805.01 1604.89,3804.57 1682.59,3804.57 R50.1@1684.59,3806.57 1675.66,3815.49 U5.4@1675.66,3877.91
RP1_5: LD4.1 RP1.5 | length 240.7
  Top Layer w6: v2(1985.09,3329.57) 1985.54,3330.01 LD4.1@2015.82,3330.01
  Bottom Layer w6: v2(1985.09,3329.57) 2002.44,3346.91 2002.44,3420.01 2053.01,3470.59 RP1.5@2093.61,3470.59
RP1_6: LD3.1 RP1.6 | length 232.8
  Top Layer w6: v2(1968.44,3406.01) LD3.1@2015.86,3406.01
  Bottom Layer w6: v2(1968.44,3406.01) 1968.44,3438.01 2036.44,3506.01 RP1.6@2093.61,3506.01
RP1_7: LD2.1 RP1.7 | length 202.6
  Top Layer w6: v2(1979.09,3483.57) 2014.23,3483.57 LD2.1@2015.35,3482.45
  Bottom Layer w6: v2(1979.09,3483.57) 1979.09,3530.24 1990.3,3541.45 RP1.7@2093.61,3541.45
RP1_8: LD1.1 RP1.8 | length 183.8
  Top Layer w6: v2(1966.44,3557.01) LD1.1@2014.86,3557.01
  Bottom Layer w6: v2(1966.44,3557.01) 2021.44,3557.01 2041.31,3576.89 RP1.8@2093.61,3576.89
S$59582: 
SWO: CN2.6 CN7.6 R8.2 R52.1 | length 2484.5
  Top Layer w6: R52.1@1645.66,2585.97 1645.66,2528.01 1612.09,2494.45 1612.09,2350.57 1662.09,2300.57 v2(1662.09,2208.57) 1662.09,1903.57 1818.09,1747.57 1818.09,1623.79 CN7.6@1870.89,1570.96
  Bottom Layer w6: v2(1662.09,2208.57) 1706.09,2208.57 1730.09,2232.57 2009.09,2232.57 2021.09,2244.57 2372.09,2244.57 2457.09,2329.57 2457.09,2408.57 2495.09,2446.57 2699.16,2446.57 CN2.6@2746.44,2493.84 ; CN2.6@2746.48,2493.89 R8.2@2846.09,2493.89
U2_4: R1.1 R2.2 U2.4 | length 180.7
  Top Layer w20: U2.4@2773.09,4006.54 2818.06,4006.53 2833.4,4021.88 R1.1@2874.09,4021.87 R2.2@2873.59,3948.57
USART1_RX: J8.3 JP2.2 R9.1 | length 4143.5
  Top Layer w6: v1(2958.09,2390.57) 3024.09,2456.57 4838.09,2456.57 5000.09,2456.57 5008.09,2464.57 5184.09,2640.57 JP2.2@5266.09,2640.57 5266.09,2690.57 5314.09,2738.57 5536.09,2738.57 5550.09,2752.57 v1(5550.09,3144.57)
  Bottom Layer w6: R9.1@2897.24,2392.74 2955.91,2392.74 v1(2958.09,2390.57) ; v1(5550.09,3144.57) 5592.09,3186.57 5592.09,3608.57 5701.19,3717.66 J8.3@5983.99,3717.66
USART1_TX: J8.2 JP2.1 R10.1 | length 4284.5
  Top Layer w6: v1(2958.09,2296.57) 3098.09,2436.57 4802.09,2436.57 5016.09,2436.57 5028.09,2448.57 5120.09,2540.57 JP2.1@5266.09,2540.57 5318.09,2592.57 5318.09,2683.57 5353.09,2718.57 5549.09,2718.57 5572.09,2741.57 v1(5572.09,3195.57)
  Bottom Layer w6: R10.1@2903.24,2294.74 2956.27,2294.74 v1(2958.09,2296.57) ; v1(5572.09,3195.57) 5572.09,3628.57 5761.19,3817.66 J8.2@5983.99,3817.66
USB+: CN6.3 R11.1 TP3.3 | length 904.2
  Top Layer w6: R11.1@1823.86,4119.9 v2(1823.86,4219.02) 1872.64,4267.8 CN6.3@1872.64,4322.59
  Bottom Layer w6: v2(1823.86,4219.02) 1845.86,4241.02 2099.44,4241.02 2133.44,4207.02 2133.44,3946.01 2110.44,3923.01 TP3.3@2055.44,3923.01
USB-: CN6.2 R12.1 TP3.2 | length 702.7
  Top Layer w6: R12.1@1892.09,4120.06 1892.09,4154.56 1873.44,4173.22 v2(1873.44,4219.02) 1898.23,4243.81 CN6.2@1898.23,4322.59
  Bottom Layer w6: v2(1873.44,4219.02) 2094.44,4219.02 2120.44,4193.02 2120.44,4041.01 2102.44,4023.01 TP3.2@2055.44,4023.01
VBUS: CN5.1 D1.1 Q1.3 R21.1 | length 533.5
  Top Layer w6: R21.1@5679.59,2438.57 5718.09,2438.57 5726.09,2430.57 5816.83,2430.57 5839.46,2407.93 Q1.3@5839.46,2360.57
  Top Layer w30: D1.1@5841.09,2240.57 5839.46,2242.2 Q1.3@5839.46,2360.57 5920.09,2360.57 5940.09,2380.57 6024.09,2380.57
VCC: C8.1 C9.1 C10.1 C11.1 C12.1 C14.1 J9.1 P1.1 R43.2 RP1.1 RP1.2 RP1.3 RP1.4 U6.1 U6.9 U6.24 U6.36 U6.48 U7.5 | length 2988.8
  Top Layer w10: U6.24@1680.01,2901.43 1745.85,2901.43 v2(1763.44,2919.01) ; v2(1786.09,3116.57) 1798.12,3128.59 U6.9@1798.12,3177.01 ; U6.36@1955.6,2842.36 1955.6,2774.28 v2(1955.86,2774.01) ; U6.1@1955.6,3177.01 1955.6,3136.76 1938.86,3120.01 v2(1938.86,3110.01) 1967.86,3110.01 1975.81,3117.97 U6.48@2014.66,3117.97
  Top Layer w20: U7.5@2119.86,3879.91 2119.86,3738.3 2133.59,3724.57 2169.86,3688.3 v2@2169.86,3632.43 ; J9.1@2144.89,3197.97 2144.86,3317.01 2169.86,3342.01 v2@2169.86,3632.43 ; v2(2169.44,3632.01) v2@2169.86,3632.44 ; v2@2172.44,3635.01 v2@2169.86,3632.44
  Bottom Layer w20: C12.1@1762.86,3064.01 1762.86,3168.01 1792.86,3198.01 1966.05,3198.01 ; 1762.86,3118.01 1784.64,3118.01 v2(1786.09,3116.57) ; v2(1763.44,2919.01) 1820.86,2919.01 1820.86,2849.01 1895.86,2774.01 v2(1955.86,2774.01) C11.1@2006.09,2777.07 2036.59,2746.57 P1.1@2128.09,2746.57 2128.09,2804.57 2085.86,2846.8 2085.86,3030.01 2051.86,3064.01 1909.86,3064.01 1909.86,3097.01 1922.86,3110.01 v2(1938.86,3110.01) ; C9.1@1983.86,3064.01 1983.86,3177.7 ; J9.1@2144.89,3197.97 2004.57,3198.01 ; RP1.4@2166.44,3470.59 2166.44,3506.01 2166.44,3541.45 2166.44,3576.89 2166.44,3632.01 v2(2169.44,3632.01) ; 1966.05,3198.01 2004.57,3198.01 ; 1966.05,3198.01 1966.05,3195.51 1983.86,3177.7 ; 1983.86,3177.7 2004.57,3198.01
VCC3.5V: C17.1 D5.2 R50.2 U5.5 | length 209.4
  Top Layer w20: D5.2@1744.84,3671.57 1751.84,3678.57 1751.84,3681.57 1750.66,3682.74 U5.5@1751.09,3877.57
VDD: B2.1 B2.2 C4.1 C5.1 C6.1 C7.1 J1.32 J2.1 J2.32 JP1.1 JP3.2 L1.1 R4.1 U4.1 U4.32 U4.64 | length 8791.3
  Top Layer w6: B2.2@3236.61,1696.98 3604.5,1696.97 3679.66,1772.13 J2.1@3839.38,1772.14
  Top Layer w7.99: U4.1@4223.8,3181.68 4225.09,3182.97 v5(4225.09,3233.01)
  Top Layer w8: v5(4225.09,3233.01) U4.64@4274.98,3232.86
  Top Layer w9: U4.32@4511.2,2894.28 4511.48,2894.57 v3(4537.09,2894.57)
  Top Layer w15: J2.1@3839.38,1772.14 3839.39,1717.27 3916.09,1640.57 5350.09,1640.57 5424.09,1714.57 5424.09,1787.43 J2.32@5339.38,1872.14
  Top Layer w20: JP1.1@2779.09,3308.57 2878.09,3308.57 2903.09,3333.57 2903.09,3568.57 3030.59,3696.07 R4.1@3030.59,3762.57 ; 3095.64,3762.57 3095.64,3764.01 3076.09,3783.57 ; v1(3806.09,3675.57) 3719.09,3762.57 R4.1@3030.59,3762.57 ; J1.32@3838.96,4169.86 3229.39,4169.86 3162.09,4102.56 3162.09,3948.57 JP3.2@3076.09,3862.56 3076.09,3783.57 ; R4.1@3030.59,3762.57 3055.09,3762.57 3076.09,3783.57
  Bottom Layer w15: JP1.1@2779.09,3308.57 3262.09,3308.57 3344.09,3226.57 3344.09,2446.57 3722.09,2068.57 3722.09,1889.43 J2.1@3839.38,1772.14 ; C6.1@4511.09,2901.07 4517.59,2894.57 v3(4537.09,2894.57)
  Bottom Layer w20: v1(3806.09,3675.57) 4065.09,3416.57 4200.09,3416.57 4225.59,3391.07 C4.1@4225.59,3364.57 ; C4.1@4224.59,3364.57 C5.1@4224.59,3314.57 C7.1@4224.59,3262.57 v5(4225.09,3233.01) 4226.09,3174.57 4411.09,2989.57 4411.09,2916.41 ; L1.1@4366.09,2901.26 4366.28,2901.07 C6.1@4511.09,2901.07 ; 4395.75,2901.07 4411.09,2916.41 ; 4426.8,2901.07 4411.09,2916.41
VDDA: C27.2 C28.2 L1.2 U4.13 | length 1492.3
  Top Layer w9: U4.13@4223.8,2992.7 4223.93,2992.57 v1(4307.09,2992.57)
  Top Layer w10: v1(4307.09,2992.57) v1(4307.09,3165.57)
  Bottom Layer w10: 3779.39,3970.57 3926.09,3823.86 3926.09,3648.57 4120.09,3454.57 4241.09,3454.57 4307.09,3388.57 v1(4307.09,3165.57) ; C27.2@4307.09,2962.07 v1(4307.09,2992.57)
  Bottom Layer w15: C28.2@4255.09,2962.07 C27.2@4307.09,2962.07
  Bottom Layer w20: C27.2@4307.09,2962.07 L1.2@4366.09,2961.89
Y1_2: C24.2 R23.2 Y1.2 | length 173.4
  Top Layer w15: C24.2@3766.59,3249.57 Y1.2@3843.09,3249.51 3938.53,3249.51 R23.2@3939.59,3250.57
Y2_1: C25.2 R26.2 Y2.1 | length 170.3
  Top Layer w15: Y2.1@3769.8,3092.81 3843.83,3092.8 C25.2@3869.09,3118.07 3926.09,3118.07 R26.2@3928.59,3120.57
Y2_3: C26.2 R27.2 Y2.3 | length 424.7
  Top Layer w15: Y2.3@3608.38,2998.32 3616.33,2998.32 3666.59,2948.07 C26.2@3869.09,2948.07 3905.09,2984.07 3905.09,3043.07 R27.2@3928.59,3066.57
Y3_1: C20.1 U6.5 Y3.1 | length 287.7
  Top Layer w6: U6.5@1876.86,3177.01 1876.86,3228.43 1921.72,3273.3 1921.72,3343.34 1921.44,3343.61 v2(1921.44,3405.01)
  Bottom Layer w6: C20.1@1880.44,3405.01 v2(1921.44,3405.01)
Y3_3: C21.2 U6.6 Y3.3 | length 459.6
  Top Layer w6: v2(1843.14,3566.01) 1831.17,3554.05 1831.17,3508.7 1831.17,3451.3 1878.44,3404.01 1878.44,3251.3 1857.18,3230.03 U6.6@1857.18,3177.01
  Bottom Layer w6: v2(1843.14,3566.01) C21.2@1880.44,3566.01
pads on no net: CN5.MH1 CN5.MH2 CN6.4 CN6.MH1 CN6.MH2 J2.12 J2.13 U6.2 U6.3 U6.4 U6.14 U6.15 U6.16 U6.17 U6.18 U6.21 U6.22 U6.29 U6.38 U6.41 U6.42 U6.43 U6.45 U6.46

## Polygon pours and split planes (outlines as drawn)
GND on Bottom Layer (solid): 1505.24,4536.75 6276.36,4536.75 6276.36,1504.89 1505.24,1504.89 1505.24,4536.5
GND on Top Layer (solid): 1505.24,4536.76 6276.36,4536.76 6276.36,1504.9 1505.24,1504.9 1505.24,4536.51

## Keep-outs
Keep-Out Layer:
  lines w8: 2155.46,1505.67 ccw(c2158.39,1584.36) 2237.13,1584.36 ; 2158.39,4534.91 cw(c2158.39,4456.17) 2237.13,4456.17 ; 2276.65,1584.36 ccw(c2355.39,1584.36) 2355.39,1505.62 ; 2276.64,4455.91 cw(c2355.38,4455.91) 2355.38,4534.65
  lines w10: 1505,4452.67 cw(c1509.01,4452.67) 1505.67,4454.89 cw(c1588.39,4452.41) 1586.93,4535.16 cw(c1588.39,4531.41) 1588.39,4535.43 ; 1505.41,1587.97 ccw(c1509.43,1587.97) 1505.69,1586.52 ccw(c1588.43,1587.97) 1587.1,1505.23 ccw(c1588.43,1509.02) 1588.43,1505 ; 2354.13,1505 ccw(c2354.13,1509.02) 2354.76,1505.05 ccw(c2355.39,1509.02) 2355.39,1505 ; 6191.81,4535.43 cw(c6192.38,4531.45) 6192.38,4535.47 cw(c6192.38,4452.71) 6275.13,4454.17 cw(c6271.38,4452.71) 6275.4,4452.71 ; 6192.38,1505 ccw(c6192.38,1587.76) 6275.13,1586.3 ccw(c6271.38,1587.76) 6275.4,1587.76 ; 2355.38,4535.43 ccw(c2355.41,4539.44) 2355.41,4535.43

## Other copper
Top Layer:
  pour cut-out: 1998.09,2954.57 2031.09,2954.57 2031.09,2947.57 1998.09,2947.57
  rectangle net VBUS: 5970.09,2362.57 6062.09,2404.57
  rectangle net GND: 1697.43,2916.72 1721.43,2927.01
  rectangle net ATLINK_5V: 1916.23,4191.02 1988.86,4229.02
  rectangle net F2_2: 1740.86,3963.01 1797.86,3995.01
  rectangle net F2_2: 1956.86,3964.01 1989.86,4078.01
  rectangle net ATLINK_5V: 1916.23,4191.02 1988.86,4200.02
  rectangle net ATLINK_5V: 1956.86,4103.02 1988.86,4229.02
  rectangle net ATLINK_5V: 1916.23,4191.02 1959.86,4331.02
Bottom Layer:
  rectangle net F2_2: 1764.86,3963.01 1989.86,3995.01

## Silkscreen, mask and mechanical layers (free items; w line width, h text height)
Top Overlay:
  lines w5: 5223.09,3842.57 5225.09,3842.57 ; 5361.09,3859.57 5359.09,3859.57 ; 5225.09,3842.57 5244.09,3861.57 5244.09,3866.57 ; 5225.09,3842.57 5261.09,3842.57 ; 5225.09,3842.57 5227.09,3842.57 5244.09,3859.57 ; 5244.09,3842.57 5241.09,3845.57 5230.09,3845.57 5231.09,3844.57 5236.09,3844.57 5242.59,3851.07 5244.09,3851.07 5252.59,3842.57 5261.09,3842.57 ; 5244.09,3842.57 5244.09,3859.57 ; 5244.09,3842.57 5249.09,3847.57 ; 5244.09,3859.57 5249.09,3854.57 5249.09,3847.57 ; 5244.09,3859.57 5264.09,3839.57 ; 5244.09,3859.57 5244.09,3866.57 ; 5244.09,3866.57 5242.09,3866.57 5215.09,3839.57 5264.09,3839.57 ; 5244.09,3866.57 5271.09,3839.57 5264.09,3839.57 ; 5249.09,3847.57 5256.09,3847.57 5261.09,3842.57 ; 5261.09,3842.57 5264.09,3839.57 ; 5320.09,3862.57 5369.09,3862.57 5342.09,3835.57 5340.09,3835.57 ; 5320.09,3862.57 5313.09,3862.57 5340.09,3835.57 ; 5320.09,3862.57 5323.09,3859.57 ; 5320.09,3862.57 5340.09,3842.57 ; 5323.09,3859.57 5331.59,3859.57 5340.09,3851.07 5341.59,3851.07 5348.09,3857.57 5353.09,3857.57 5354.09,3856.57 5343.09,3856.57 5340.09,3859.57 ; 5323.09,3859.57 5328.09,3854.57 5335.09,3854.57 ; 5323.09,3859.57 5359.09,3859.57 ; 5335.09,3854.57 5340.09,3859.57 ; 5335.09,3854.57 5335.09,3847.57 5340.09,3842.57 ; 5340.09,3835.57 5340.09,3842.57 ; 5340.09,3835.57 5340.09,3840.57 5359.09,3859.57 ; 5340.09,3842.57 5340.09,3859.57 ; 5340.09,3842.57 5357.09,3859.57 5359.09,3859.57
  lines w6: 1720.08,1797.28 1720.08,2096.28 ; 1820.08,1798.28 1820.08,2097.28 ; 1920.08,1798.28 1920.08,2098.28 ; 2022.08,1797.28 2022.08,2091.28
  lines w6 net S$59582: 4633.1,2662.23 5186.98,2662.66 5186.98,2507.57 4633.89,2507.11 ; 4633.49,2584.67 5186.99,2584.51 ; 4633.89,2507.13 4633.89,2662.23 ; 4786.98,2507.57 4788.98,2507.57 4788.98,2662.66 ; 4995.98,2507.57 4995.98,2662.66
  lines w8: 1818.43,1723.02 1818.43,1763.02 1918.43,1763.02 1918.43,1722.02 ; 2108.98,1777.02 2071.98,1740.02 2032.98,1779.02 2108.98,1779.02 ; 2533.08,2731.2 2533.08,2655.2 2572.08,2694.2 2535.08,2731.2 ; 2596.08,2444.2 2556.08,2444.2 2556.08,2544.2 2597.08,2544.2
  lines w10: 3951.68,3697.72 5367.38,3697.72 ; 4225.59,2358.57 4678.59,2358.57 ; 4814.09,2358.57 5374.09,2358.57
  text "43" at 4806.09,4432.56 h40
  text "33" at 5312.09,4432.56 h40
  text "53" at 4312.09,4430.56 h40
  text "63" at 3806.09,4428.56 h40
  text "F6" at 4647.71,4329.55 h36 r45
  text "C12" at 4344.82,4327.84 h36 r45
  text "A12*" at 4738.07,4327.82 h36 r45
  text "A10" at 4836.82,4327.84 h36 r45
  text "A8" at 4944.82,4327.84 h36 r45
  text "C8" at 5042.82,4327.84 h36 r45
  text "B7" at 4054.82,4325.84 h36 r45
  text "B5" at 4150.5,4325.52 h36 r45
  text "B3" at 4246.76,4325.54 h36 r45
  text "B14" at 5242.82,4325.84 h36 r45
  text "B8" at 3948.82,4323.84 h36 r45
  text "C10" at 4438.82,4323.84 h36 r45
  text "A14" at 4532.82,4323.84 h36 r45
  text "C6" at 5148.82,4323.84 h36 r45
  text "B12" at 5348.82,4323.84 h36 r45
  text "GND" at 3837.34,4317.07 h36 r45
  text "GND" at 2913.43,4276.31 h48
  text "B9" at 3942.82,4029.84 h36 r45
  text "F7" at 4641.72,4025.55 h36 r45
  text "D2" at 4347.44,4024.39 h36 r45
  text "C11" at 4440.14,4023.82 h36 r45
  text "C9" at 5044.82,4023.84 h36 r45
  text "B6" at 4144.51,4021.52 h36 r45
  text "B4" at 4240.78,4021.54 h36 r45
  text "A9" at 4944.82,4021.84 h36 r45
  text "C7" at 5144.82,4021.84 h36 r45
  text "B15" at 5234.82,4017.84 h36 r45
  text "A15" at 4538.82,4015.84 h36 r45
  text "B13" at 5346.82,4015.84 h36 r45
  text "A13" at 4732.82,4013.84 h36 r45
  text "A11*" at 4834.82,4013.84 h36 r45
  text "BOOT0" at 3993.59,4007.57 h30 r30
  text "VDD" at 3816.82,4005.84 h36 r45
  text "4" at 4940.43,3880.33 h48 r235
  text "3V3" at 5784.09,3874.57 h42
  text "2" at 5138.09,3864.57 h48 r270
  text "8" at 4482.09,3863.57 h48 r270
  text "7" at 4648.53,3859.99 h48 r281
  text "13" at 4036.09,3838.26 h48 r90
  text "12" at 4130.09,3838.26 h48 r90
  text "#3" at 5092.03,3822.24 h48 r94
  text "#6" at 4788.03,3820.24 h48 r94
  text "#5" at 4892.03,3820.24 h48 r94
  text "#9" at 4430.09,3818.57 h48 r90
  text "#11" at 4234.09,3810.76 h48 r90
  text "IDD" at 3150.16,3805.8 h48
  text "#10" at 4330.09,3791.07 h48 r90
  text "SCL" at 3628.09,3775.86 h48 r90
  text "USART1_TX" at 5569.09,3774.57 h42
  text "GND" at 3930.09,3771.47 h48 r90
  text "SDA" at 3732.09,3769.26 h48 r90
  text "TX 1" at 5290.09,3752.57 h48 r90
  text "RX 0" at 5394.08,3750.15 h48 r89
  text "VDDA" at 3828.09,3719.97 h48 r90
  text "DIGITAL(#=PWM)" at 4354.09,3703.57 h42
  text "USART1_RX" at 5564.09,3679.57 h42
  text "LD:" at 2132.89,3675.57 h42 r270
  text "GND" at 5789.09,3569.57 h42
  text "AT-Link-EZ V1.2" at 1520.09,3566.57 h60 r270
  text "1" at 2177.07,3559.26 h42 r90
  text "2" at 2176.07,3492.26 h42 r90
  text "GND" at 2592.09,3465.57 h42
  text "USB_HOST" at 5861.68,3428.62 h48
  text "3" at 2175.07,3419.26 h42 r90
  text "BOOT0" at 2485.09,3353.57 h48
  text "4" at 2172.06,3331.92 h42 r54
  text "VDD" at 2596.09,3252.57 h42
  text "MISO" at 5134.09,3129.57 h42
  text "5V" at 5539.09,3124.57 h42
  text "SCK" at 5154.09,3024.57 h42
  text "MOSI" at 5529.09,3024.57 h42
  text "GND" at 5529.09,2929.57 h42
  text "RESET" at 5084.09,2924.57 h42
  text "NSS" at 5154.09,2824.57 h42
  text "PB11" at 5534.09,2819.57 h42
  text "AT-Link" at 2541.09,2766.41 h60 r1
  text "USART1" at 4606.49,2665.51 h42
  text "OTG1" at 5016.19,2666.43 h42
  text "5V" at 2834.09,2654.57 h42
  text "3V3" at 2398.09,2648.57 h42
  text "ID" at 5085.6,2601.99 h42 r90
  text "PA10" at 4840.35,2580.2 h42
  text "RX" at 4680.16,2578.24 h42
  text "SWD" at 2402.09,2554.57 h42
  text "BOOT0" at 2834.09,2549.57 h42
  text "VBUS" at 5016.15,2500.59 h42
  text "PA9" at 4848.64,2498.64 h42
  text "TX" at 4674.04,2492.36 h42
  text "SWO" at 2834.09,2449.57 h42
  text "SWC" at 2399.09,2439.57 h42
  text "AT-START-F425 V1.0" at 3266.09,2394.15 h72.83
  text "USART1_RX" at 2834.09,2344.57 h42
  text "NRST" at 2404.09,2339.57 h42
  text "POWER" at 4462.09,2271.57 h42
  text "ANALOG IN" at 4966.09,2271.57 h42
  text "GND" at 2404.09,2249.57 h42
  text "USART1_TX" at 2834.09,2244.57 h42
  text "USB_OTG" at 5925.68,2165.28 h48
  text "AN0" at 4859.39,2146.72 h48 r90
  text "AN1" at 4955.39,2146.72 h48 r90
  text "AN2" at 5060.39,2145.72 h48 r90
  text "AN3" at 5161.39,2145.72 h48 r90
  text "AN4" at 5263.39,2145.72 h48 r90
  text "AN5" at 5363.39,2145.72 h48 r90
  text "IOREF" at 4088.09,2144.57 h48 r90
  text "RESET" at 4185.09,2143.57 h48 r90
  text "3.3V" at 4286.09,2142.57 h48 r90
  text "5V" at 4386.09,2142.57 h48 r90
  text "GND" at 4487.09,2142.57 h48 r90
  text "GND" at 4586.38,2142.57 h48 r90
  text "VIN" at 4690.09,2142.57 h48 r90
  text "SWD" at 1927.1,2094.86 h42 r270
  text "GND" at 1623.09,2090.57 h42 r270
  text "NRST" at 1723.09,2090.57 h42 r270
  text "SWC" at 1828.09,2090.57 h42 r270
  text "3V3" at 2023.09,2090.57 h42 r270
  text "F4" at 4643.72,1929.55 h36 r45
  text "B0" at 5026.14,1928.99 h36 r45
  text "B2" at 5126.94,1928.97 h36 r45
  text "F1*" at 4054.82,1927.84 h36 r45
  text "NC" at 4349.44,1928.39 h36 r45
  text "A0" at 4442.14,1927.82 h36 r45
  text "A2" at 4535.97,1927.82 h36 r45
  text "A4" at 4734.09,1927.82 h36 r45
  text "A6" at 4827.91,1927.82 h36 r45
  text "BOOT0" at 1937.34,1925.57 h31.5 r270
  text "C0" at 4146.51,1925.52 h36 r45
  text "C2" at 4242.78,1925.54 h36 r45
  text "C4" at 4924.15,1925.52 h36 r45
  text "SWO" at 1829.08,1925.28 h42 r270
  text "B11" at 5232.43,1925.17 h36 r45
  text "C13" at 3833.36,1917.07 h36 r45
  text "C15*" at 3940.82,1913.84 h36 r45
  text "VDD" at 5340.82,1911.84 h36 r45
  text "RX" at 1622.08,1902.28 h42 r270
  text "TX" at 1723.09,1900.97 h42 r270
  text "5V" at 2022.08,1900.97 h42 r270
  text "GND" at 5796.94,1704.65 h48
  text "C1" at 4250.82,1633.84 h36 r45
  text "A1" at 4546.14,1632.33 h36 r45
  text "NC" at 4446.82,1627.84 h36 r45
  text "F5" at 4738.82,1627.84 h36 r45
  text "B1" at 5142.82,1627.84 h36 r45
  text "C3" at 4344.82,1625.84 h36 r45
  text "C5" at 5036.82,1623.84 h36 r45
  text "A3" at 4630.73,1623.06 h36 r45
  text "A7" at 4938.82,1621.84 h36 r45
  text "F0*" at 4034.82,1619.84 h36 r45
  text "A5" at 4832.82,1617.84 h36 r45
  text "B10" at 5228.82,1609.84 h36 r45
  text "C14*" at 3926.82,1605.84 h36 r45
  text "VDD" at 3810.82,1603.84 h36 r45
  text "GND" at 5324.82,1603.84 h36 r45
  text "NRST" at 4104.82,1579.84 h36 r45
  text "1" at 3831.09,1570.57 h40 r180
  text "RESET" at 2791.39,1555.71 h48
  text "USER" at 3313.39,1554.71 h48
  text "11" at 4345.09,1553.57 h40 r90
  text "21" at 4819.09,1535.57 h40
  text "31" at 5318.09,1534.57 h40
Bottom Overlay:
  text "61" at 3916.95,4308.42 h40 r315
  text "59" at 4025.95,4308.42 h40 r315
  text "57" at 4126.95,4308.42 h40 r315
  text "55" at 4224.95,4308.42 h40 r315
  text "53" at 4325.95,4308.42 h40 r315
  text "51" at 4425.95,4308.42 h40 r315
  text "39" at 5026.95,4308.42 h40 r315
  text "37" at 5127.95,4308.42 h40 r315
  text "35" at 5226.95,4308.42 h40 r315
  text "33" at 5331.95,4308.42 h40 r315
  text "63" at 3817.95,4303.42 h40 r315
  text "49" at 4528.95,4303.42 h40 r315
  text "43" at 4828.95,4303.42 h40 r315
  text "47" at 4625.95,4301.42 h40 r315
  text "45" at 4723.95,4301.42 h40 r315
  text "41" at 4926.95,4301.42 h40 r315
  text "64" at 3829.95,4033.42 h40 r315
  text "62" at 3929.95,4033.42 h40 r315
  text "60" at 4029.95,4033.42 h40 r315
  text "58" at 4134.95,4033.42 h40 r315
  text "50" at 4536.95,4033.42 h40 r315
  text "34" at 5335.95,4033.42 h40 r315
  text "52" at 4436.95,4032.42 h40 r315
  text "44" at 4838.95,4032.42 h40 r315
  text "42" at 4935.95,4032.42 h40 r315
  text "38" at 5136.95,4032.42 h40 r315
  text "36" at 5238.95,4032.42 h40 r315
  text "48" at 4641.95,4031.42 h40 r315
  text "46" at 4739.95,4031.42 h40 r315
  text "40" at 5037.95,4031.42 h40 r315
  text "56" at 4236.95,4028.42 h40 r315
  text "54" at 4336.95,4028.42 h40 r315
  text "VDD" at 2028.09,3196.57 h36 r270
  text "M-BOOT0" at 2028.09,2886.57 h36 r270
  text "VDD" at 2098.82,2719.84 h36 r45
  text "AT32F425R8T7-7" at 4837.09,2142.57 h120
  text "2" at 3823.95,1924.07 h40 r315
  text "6" at 4016.77,1921.71 h40 r310
  text "8" at 4121.95,1922.42 h40 r315
  text "4" at 3932.96,1914.81 h40 r351
  text "10" at 4227.95,1912.42 h40 r315
  text "12" at 4329.95,1912.42 h40 r315
  text "16" at 4527.95,1912.42 h40 r315
  text "14" at 4425.95,1910.42 h40 r315
  text "18" at 4622.95,1910.42 h40 r315
  text "20" at 4724.95,1909.42 h40 r315
  text "22" at 4831.95,1909.42 h40 r315
  text "24" at 4932.95,1909.42 h40 r315
  text "26" at 5029.95,1908.42 h40 r315
  text "28" at 5137.95,1908.42 h40 r315
  text "32" at 5331.95,1905.42 h40 r315
  text "30" at 5234.95,1904.42 h40 r315
  text "11" at 4315.95,1680.71 h40 r225
  text "5" at 4009.91,1656.81 h40 r306
  text "1" at 3813.95,1656.07 h40 r315
  text "9" at 4212.77,1655.71 h40 r310
  text "7" at 4107.51,1655.38 h40 r304
  text "3" at 3903.22,1652.6 h40 r315
  text "19" at 4727.95,1649.42 h40 r315
  text "15" at 4527.95,1648.42 h40 r315
  text "13" at 4426.95,1647.42 h40 r315
  text "21" at 4829.95,1647.42 h40 r315
  text "31" at 5331.95,1645.31 h40 r315
  text "17" at 4629.95,1644.42 h40 r315
  text "29" at 5244.95,1640.42 h40 r315
  text "25" at 5041.95,1637.42 h40 r315
  text "23" at 4940.95,1636.42 h40 r315
  text "27" at 5137.95,1634.42 h40 r315